# Altium PCB led_2835_driver_circle_10X10cm.PcbDoc
Units mm, origin at the board's own origin, x right, y up, seen from the top; angles counter-clockwise.
Board outline 100 x 100 mm, 2 copper layers (Top Layer, Bottom Layer); 37 components, 32 nets, 74 pads, 0 vias.
Unrouted connection lines stored in the file: 1.
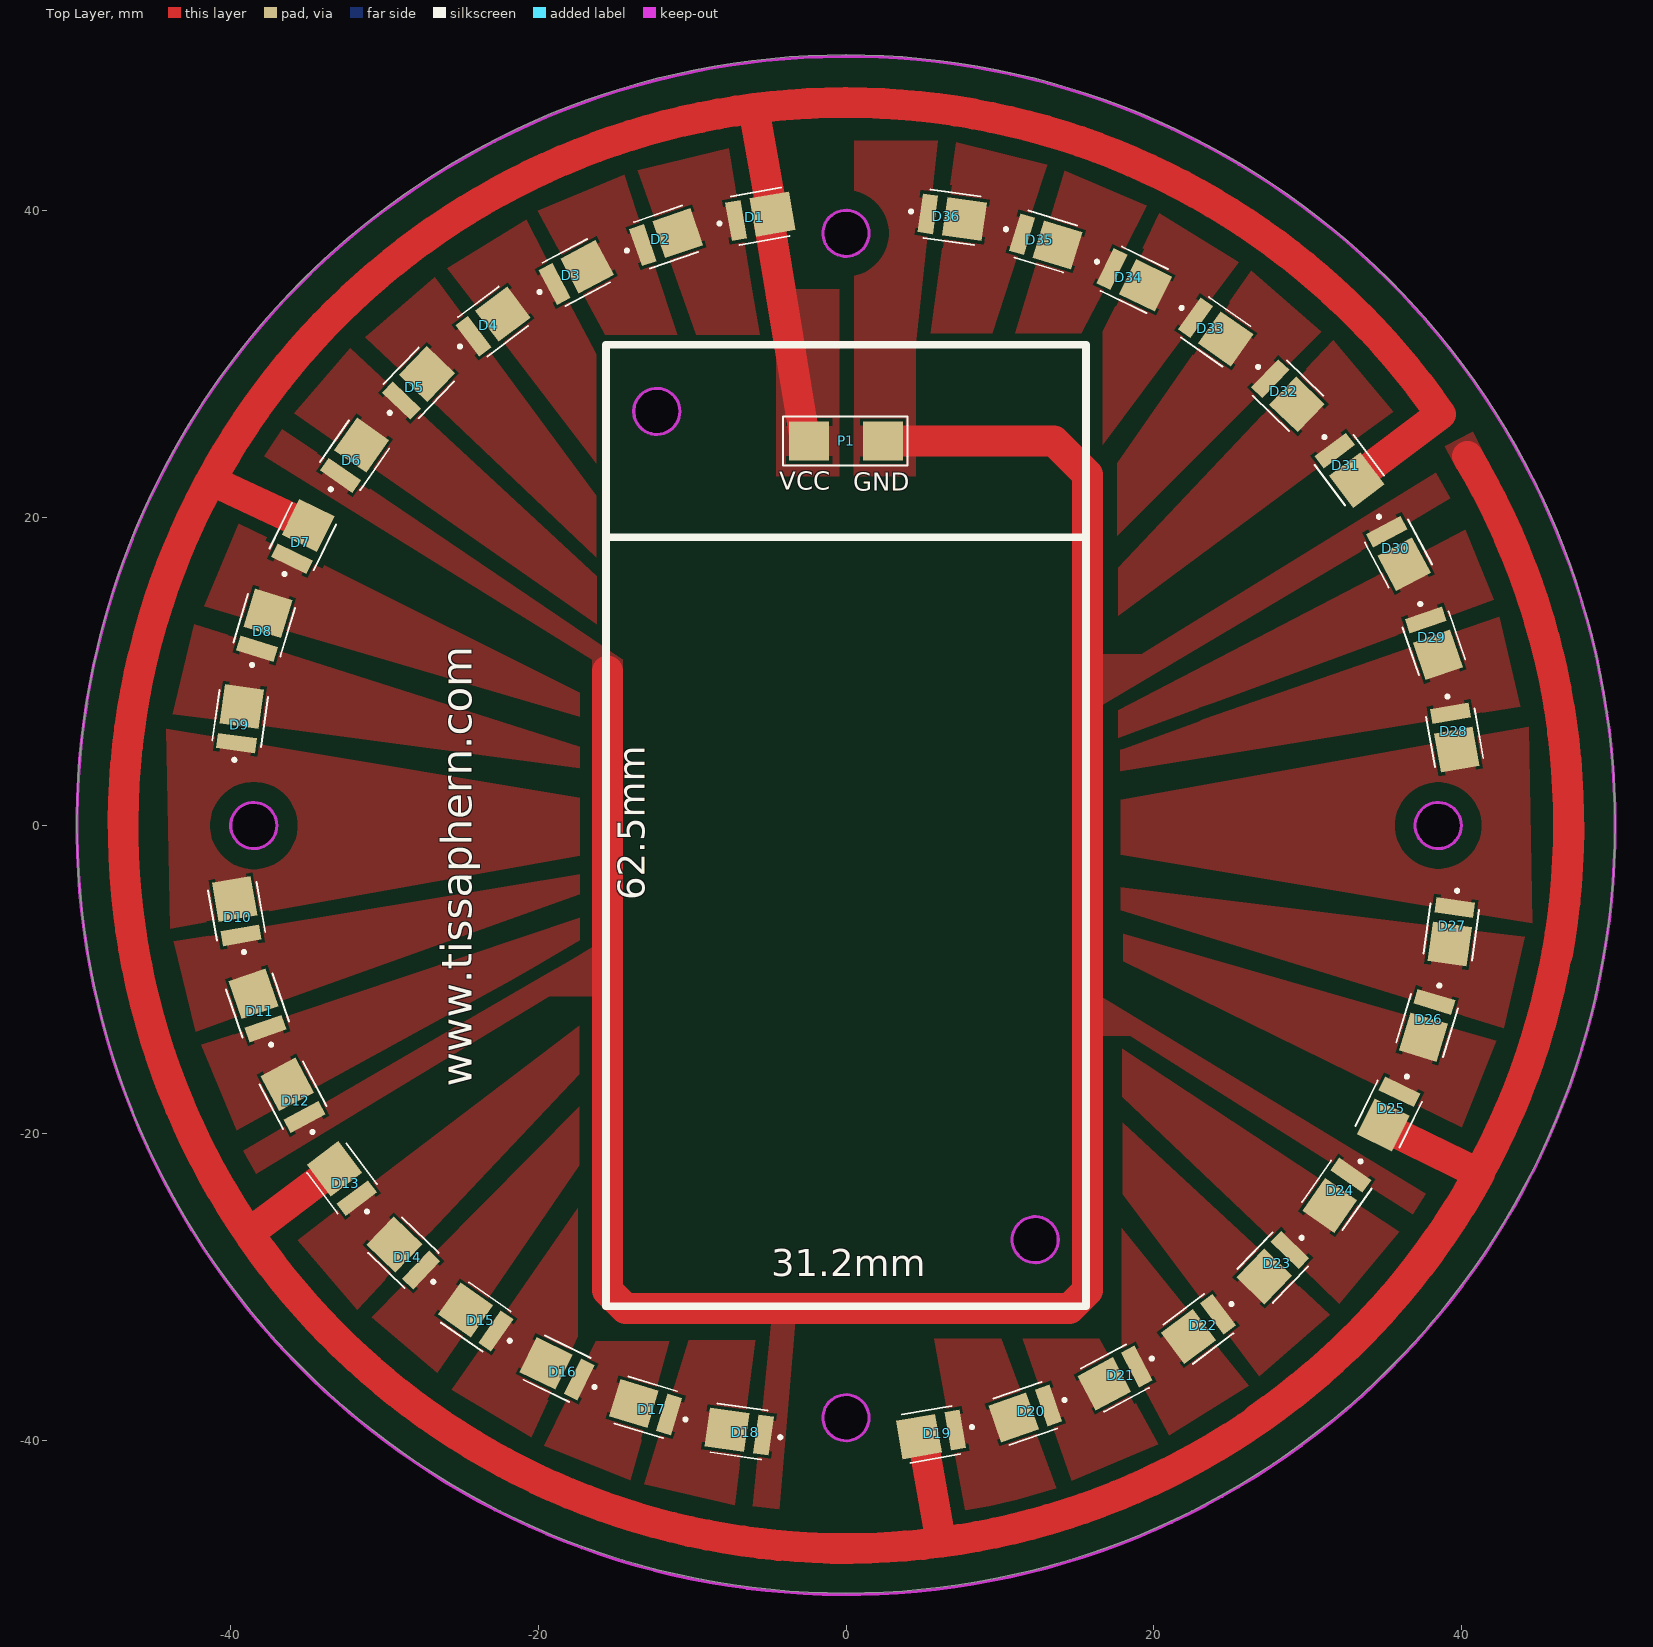
[diagram p0: Top Layer view]
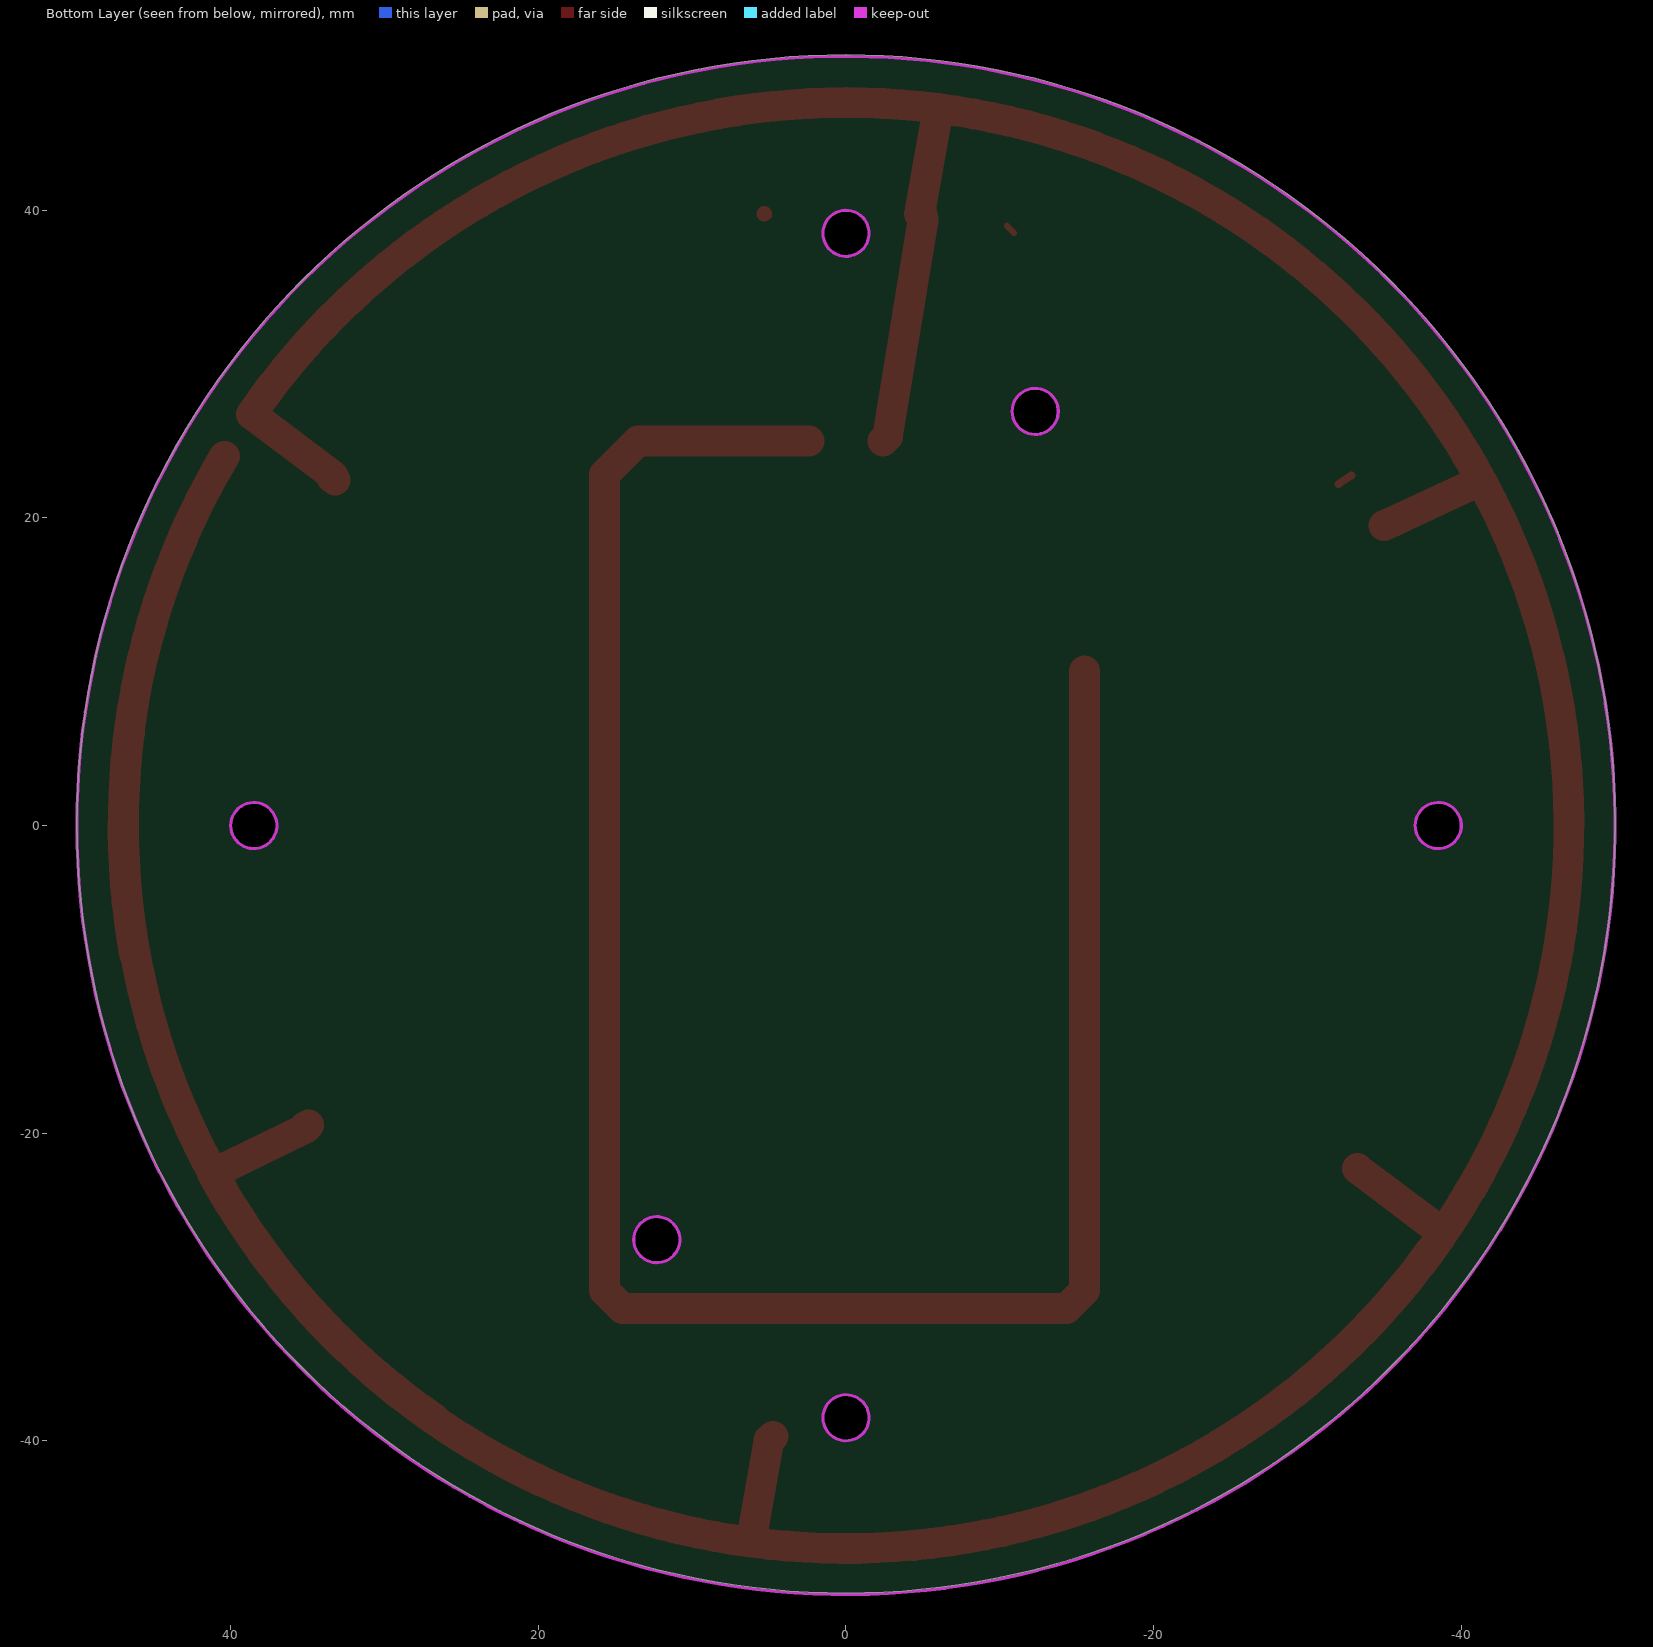
[diagram p1: Bottom Layer view, seen from below]

## Layer stack, top to bottom
Top Solder: solder mask 0.0102, Solder Resist, Dk 3.5
Top Layer: signal copper 0.0356
Dielectric 1: dielectric 0.32, FR-4, Dk 4.8
Bottom Layer: signal copper 0.0356
Bottom Solder: solder mask 0.0102, Solder Resist, Dk 3.5

## Board outline
-50,0.1 ccw(c0,0.1) 0,-49.9 ccw(c0,0.1) 50,0.1 ccw(c0,0.1) 0,50.1 ccw(c0,0.1)
cut-out: 10.8,-26.925 ccw(c12.3,-26.925) 12.3,-28.425 ccw(c12.3,-26.925) 13.8,-26.925 ccw(c12.3,-26.925) 12.3,-25.425 ccw(c12.3,-26.925)
cut-out: -12.3,25.425 cw(c-12.3,26.925) -13.8,26.925 cw(c-12.3,26.925) -12.3,28.425 cw(c-12.3,26.925) -10.8,26.925 cw(c-12.3,26.925)
cut-out: -37,0 ccw(c-38.5,0) -38.5,1.5 ccw(c-38.5,0) -40,0 ccw(c-38.5,0) -38.5,-1.5 ccw(c-38.5,0)
cut-out: -1.5,-38.5 ccw(c0,-38.5) 0,-40 ccw(c0,-38.5) 1.5,-38.5 ccw(c0,-38.5) 0,-37 ccw(c0,-38.5)
cut-out: 37,0 ccw(c38.5,0) 38.5,-1.5 ccw(c38.5,0) 40,0 ccw(c38.5,0) 38.5,1.5 ccw(c38.5,0)
cut-out: 0,37 cw(c0,38.5) -1.5,38.5 cw(c0,38.5) 0,40 cw(c0,38.5) 1.5,38.5 cw(c0,38.5)
cut-out: 0,3738.5 cw(c0,3740) -1.5,3740 cw(c0,3740) 0,3741.5 cw(c0,3740) 1.5,3740 cw(c0,3740)

## Design rules (kind name [scope] priority, off if disabled: settings)
Clearance Clearance_Poly [All vs InPolygon] p1: gap=0.8 ignorepadtopadclearanceinfootprint=FALSE
Clearance [All] p2: gap=0.3 ignorepadtopadclearanceinfootprint=FALSE
PolygonConnect PolygonConnect_52 [All vs IsNamedPolygon('VCC_L01_P113')] p1: connectstyle=Relief reliefconductorwidth=2 reliefentries=2 polygonreliefangle="90 Angle" airgapwidth=0.2
PolygonConnect PolygonConnect_51 [All vs IsNamedPolygon('GND_L01_P112')] p2: connectstyle=Relief reliefconductorwidth=2 reliefentries=2 polygonreliefangle="90 Angle" airgapwidth=0.2
PolygonConnect PolygonConnect_50 [All vs IsNamedPolygon('GND_L01_P111')] p3: connectstyle=Relief reliefconductorwidth=2 reliefentries=2 polygonreliefangle="90 Angle" airgapwidth=0.2
PolygonConnect PolygonConnect_49 [All vs IsNamedPolygon('GND_L01_P111')] p4: connectstyle=Relief reliefconductorwidth=2 reliefentries=4 polygonreliefangle="90 Angle" airgapwidth=0.254
PolygonConnect PolygonConnect_48 [All vs IsNamedPolygon('VCC_L01_P101')] p5: connectstyle=Relief reliefconductorwidth=2 reliefentries=2 polygonreliefangle="90 Angle" airgapwidth=0.2
PolygonConnect PolygonConnect_47 [All vs IsNamedPolygon('GND_L01_P100')] p6: connectstyle=Relief reliefconductorwidth=2 reliefentries=2 polygonreliefangle="90 Angle" airgapwidth=0.2
PolygonConnect PolygonConnect_46 [All vs IsNamedPolygon('GND_L01_P086')] p7: connectstyle=Relief reliefconductorwidth=2 reliefentries=2 polygonreliefangle="90 Angle" airgapwidth=0.2
PolygonConnect PolygonConnect_45 [All vs IsNamedPolygon('GND_L01_P086')] p8: connectstyle=Relief reliefconductorwidth=2 reliefentries=2 polygonreliefangle="90 Angle" airgapwidth=0.2
PolygonConnect PolygonConnect_44 [All vs IsNamedPolygon('GND_L01_P086')] p9: connectstyle=Relief reliefconductorwidth=0.254 reliefentries=4 polygonreliefangle="90 Angle" airgapwidth=0.2
PolygonConnect PolygonConnect_43 [All vs IsNamedPolygon('GND_L01_P086')] p10: connectstyle=Relief reliefconductorwidth=2 reliefentries=2 polygonreliefangle="90 Angle" airgapwidth=0.2
PolygonConnect PolygonConnect_42 [All vs IsNamedPolygon('NETD9_C_L01_P080')] p11: connectstyle=Relief reliefconductorwidth=2 reliefentries=2 polygonreliefangle="90 Angle" airgapwidth=0.2
PolygonConnect PolygonConnect_41 [All vs IsNamedPolygon('NETD27_C_L01_P081')] p12: connectstyle=Relief reliefconductorwidth=2 reliefentries=2 polygonreliefangle="90 Angle" airgapwidth=0.2
PolygonConnect PolygonConnect_40 [All vs IsNamedPolygon('GND_L01_P086')] p13: connectstyle=Relief reliefconductorwidth=2 reliefentries=2 polygonreliefangle="90 Angle" airgapwidth=0.2
PolygonConnect PolygonConnect_39 [All vs IsNamedPolygon('VCC_L01_P097')] p14: connectstyle=Relief reliefconductorwidth=2 reliefentries=2 polygonreliefangle="90 Angle" airgapwidth=0.2
PolygonConnect PolygonConnect_38 [All vs IsNamedPolygon('GND_L01_P095')] p15: connectstyle=Relief reliefconductorwidth=2 reliefentries=4 polygonreliefangle="90 Angle" airgapwidth=1
PolygonConnect PolygonConnect_37 [All vs IsNamedPolygon('GND_L01_P086')] p16: connectstyle=Direct reliefconductorwidth=2 reliefentries=4 polygonreliefangle="90 Angle" airgapwidth=0.2
PolygonConnect PolygonConnect_36 [All vs IsNamedPolygon('GND_L01_P095')] p17: connectstyle=Relief reliefconductorwidth=2 reliefentries=2 polygonreliefangle="90 Angle" airgapwidth=0.2
PolygonConnect PolygonConnect_35 [All vs IsNamedPolygon('GND_L01_P095')] p18: connectstyle=Relief reliefconductorwidth=2 reliefentries=2 polygonreliefangle="90 Angle" airgapwidth=0.2
PolygonConnect PolygonConnect_34 [All vs IsNamedPolygon('GND_L01_P086')] p19: connectstyle=Relief reliefconductorwidth=2 reliefentries=2 polygonreliefangle="90 Angle" airgapwidth=0.2
PolygonConnect PolygonConnect_33 [All vs IsNamedPolygon('GND_L01_P086')] p20: connectstyle=Relief reliefconductorwidth=2 reliefentries=2 polygonreliefangle="90 Angle" airgapwidth=0.2
PolygonConnect PolygonConnect_32 [All vs IsNamedPolygon('GND_L01_P091')] p21: connectstyle=Relief reliefconductorwidth=2 reliefentries=2 polygonreliefangle="90 Angle" airgapwidth=0.2
PolygonConnect PolygonConnect_31 [All vs IsNamedPolygon('GND_L01_P082')] p22: connectstyle=Relief reliefconductorwidth=2 reliefentries=2 polygonreliefangle="90 Angle" airgapwidth=0.2
PolygonConnect PolygonConnect_30 [All vs IsNamedPolygon('GND_L01_P082')] p23: connectstyle=Relief reliefconductorwidth=0.254 reliefentries=4 polygonreliefangle="90 Angle" airgapwidth=0.2
PolygonConnect PolygonConnect_29 [All vs IsNamedPolygon('GND_L01_P090')] p24: connectstyle=Relief reliefconductorwidth=2 reliefentries=2 polygonreliefangle="90 Angle" airgapwidth=0.2
PolygonConnect PolygonConnect_28 [All vs IsNamedPolygon('GND_L01_P088')] p25: connectstyle=Relief reliefconductorwidth=2 reliefentries=2 polygonreliefangle="90 Angle" airgapwidth=0.2
PolygonConnect PolygonConnect_27 [All vs IsNamedPolygon('GND_L01_P082')] p26: connectstyle=Relief reliefconductorwidth=2 reliefentries=2 polygonreliefangle="90 Angle" airgapwidth=0.2
PolygonConnect PolygonConnect_26 [All vs IsNamedPolygon('GND_L01_P087')] p27: connectstyle=Relief reliefconductorwidth=2 reliefentries=2 polygonreliefangle="90 Angle" airgapwidth=0.2
PolygonConnect PolygonConnect_25 [All vs IsNamedPolygon('GND_L01_P086')] p28: connectstyle=Relief reliefconductorwidth=2 reliefentries=2 polygonreliefangle="90 Angle" airgapwidth=0.2
PolygonConnect PolygonConnect_24 [All vs IsNamedPolygon('GND_L01_P086')] p29: connectstyle=Relief reliefconductorwidth=1 reliefentries=2 polygonreliefangle="90 Angle" airgapwidth=0.2
PolygonConnect PolygonConnect_23 [All vs IsNamedPolygon('GND_L01_P083')] p30: connectstyle=Relief reliefconductorwidth=1 reliefentries=2 polygonreliefangle="90 Angle" airgapwidth=0.2
PolygonConnect PolygonConnect_22 [All vs IsNamedPolygon('NETD9_C_L01_P079')] p31: connectstyle=Relief reliefconductorwidth=2 reliefentries=2 polygonreliefangle="90 Angle" airgapwidth=0.2
PolygonConnect PolygonConnect_21 [All vs IsNamedPolygon('NETD1_C_L01_P01')] p32: connectstyle=Relief reliefconductorwidth=2 reliefentries=2 polygonreliefangle="90 Angle" airgapwidth=0.2
PolygonConnect PolygonConnect_20 [All vs IsNamedPolygon('NETD1_C_L01_P01')] p33: connectstyle=Relief reliefconductorwidth=2 reliefentries=4 polygonreliefangle="90 Angle" airgapwidth=0.2
PolygonConnect PolygonConnect_19 [All vs IsNamedPolygon('NETD9_C_L01_P010')] p34: connectstyle=Relief reliefconductorwidth=2 reliefentries=4 polygonreliefangle="90 Angle" airgapwidth=0.2
PolygonConnect PolygonConnect_18 [All vs IsNamedPolygon('NETD1_C_L01_P032')] p35: connectstyle=Relief reliefconductorwidth=2 reliefentries=2 polygonreliefangle="90 Angle" airgapwidth=0.2
PolygonConnect PolygonConnect_17 [All vs IsNamedPolygon('NETD1_C_L01_P001')] p36: connectstyle=Relief reliefconductorwidth=2 reliefentries=2 polygonreliefangle="90 Angle" airgapwidth=0.2
PolygonConnect PolygonConnect_16 [All vs IsNamedPolygon('NETD1_C_L01_P001')] p37: connectstyle=Relief reliefconductorwidth=2.54 reliefentries=4 polygonreliefangle="90 Angle" airgapwidth=0.2
PolygonConnect PolygonConnect_15 [All vs IsNamedPolygon('NETD1_C_L01_P001')] p38: connectstyle=Relief reliefconductorwidth=3 reliefentries=4 polygonreliefangle="90 Angle" airgapwidth=0.2
PolygonConnect PolygonConnect_14 [All vs IsNamedPolygon('NETD1_C_L01_P001')] p39: connectstyle=Relief reliefconductorwidth=2 reliefentries=2 polygonreliefangle="90 Angle" airgapwidth=0.2
PolygonConnect PolygonConnect_13 [All vs IsNamedPolygon('NETD1_C_L01_P001')] p40: connectstyle=Relief reliefconductorwidth=2 reliefentries=2 polygonreliefangle="45 Angle" airgapwidth=0.2
PolygonConnect PolygonConnect_12 [All vs IsNamedPolygon('NETD1_C_L01_P001')] p41: connectstyle=Relief reliefconductorwidth=2 reliefentries=2 polygonreliefangle="90 Angle" airgapwidth=0.2
PolygonConnect PolygonConnect_11 [All vs IsNamedPolygon('NETD1_C_L01_P001')] p42: connectstyle=Relief reliefconductorwidth=1 reliefentries=2 polygonreliefangle="90 Angle" airgapwidth=0.1
PolygonConnect PolygonConnect_10 [All vs IsNamedPolygon('NETD1_C_L01_P001')] p43: connectstyle=Relief reliefconductorwidth=2 reliefentries=4 polygonreliefangle="90 Angle" airgapwidth=0.2
PolygonConnect PolygonConnect_9 [All vs IsNamedPolygon('NETD1_C_L01_P001')] p44: connectstyle=Relief reliefconductorwidth=1 reliefentries=4 polygonreliefangle="90 Angle" airgapwidth=0.2
PolygonConnect PolygonConnect_8 [All vs IsNamedPolygon('NETD1_C_L01_P001')] p45: connectstyle=Relief reliefconductorwidth=0.5 reliefentries=4 polygonreliefangle="90 Angle" airgapwidth=0.2
PolygonConnect "FIrst Net" [All vs IsNamedPolygon('NETD1_C_L01_P001')] p46: connectstyle=Relief reliefconductorwidth=1 reliefentries=4 polygonreliefangle="90 Angle" airgapwidth=1
PolygonConnect 1 [All vs IsNamedPolygon('NETD1_C_L01_P001')] p47: connectstyle=Relief reliefconductorwidth=1 reliefentries=4 polygonreliefangle="90 Angle" airgapwidth=1
PolygonConnect PolygonConnect_7 [All vs IsNamedPolygon('NETD1_C_L01_P001')] p48: connectstyle=Relief reliefconductorwidth=0.5 reliefentries=4 polygonreliefangle="90 Angle" airgapwidth=0.5
PolygonConnect "First Conection Style" [All vs IsNamedPolygon('NETD2_C_L01_P002')] p49: connectstyle=Relief reliefconductorwidth=1 reliefentries=4 polygonreliefangle="90 Angle" airgapwidth=1
PolygonConnect "First Connect Style" [All vs IsNamedPolygon('NETD1_C_L01_P001')] p50: connectstyle=Direct reliefconductorwidth=1 reliefentries=4 polygonreliefangle="90 Angle" airgapwidth=1
PolygonConnect PolygonConnect_6 [All vs IsNamedPolygon('NETD1_C_L01_P001')] p51: connectstyle=Relief reliefconductorwidth=1 reliefentries=4 polygonreliefangle="90 Angle" airgapwidth=0.254
PolygonConnect PolygonConnect_5 [All vs IsNamedPolygon('NETD1_C_L01_P001')] p52: connectstyle=Direct reliefconductorwidth=0.254 reliefentries=4 polygonreliefangle="90 Angle" airgapwidth=0.254
PolygonConnect PolygonConnect_4 [All vs IsNamedPolygon('NETD1_C_L01_P001')] p53: connectstyle=Relief reliefconductorwidth=0.254 reliefentries=4 polygonreliefangle="90 Angle" airgapwidth=0.254
PolygonConnect 1234 [All vs IsNamedPolygon('NONET_L01_P001')] p54: thpad.connectstyle=Relief thpad.reliefconductorwidth=0.254 thpad.reliefentries=4 thpad.polygonreliefangle="90 Angle" thpad.airgapwidth=0.254 smdpad.connectstyle=Direct smdpad.reliefconductorwidth=0.254 smdpad.reliefentries=4 smdpad.polygonreliefangle="90 Angle" smdpad.airgapwidth=0.254 via.connectstyle=Relief via.reliefconductorwidth=0.254 via.reliefentries=4 via.polygonreliefangle="90 Angle" via.airgapwidth=0.254
PolygonConnect PolygonConnect_3 [All vs IsNamedPolygon('NONET_L01_P001')] p55: thpad.connectstyle=Relief thpad.reliefconductorwidth=0.254 thpad.reliefentries=4 thpad.polygonreliefangle="90 Angle" thpad.airgapwidth=0.254 smdpad.connectstyle=Direct smdpad.reliefconductorwidth=0.254 smdpad.reliefentries=4 smdpad.polygonreliefangle="90 Angle" smdpad.airgapwidth=0.254 via.connectstyle=Relief via.reliefconductorwidth=0.254 via.reliefentries=4 via.polygonreliefangle="90 Angle" via.airgapwidth=0.254
PolygonConnect "SMD Pad Coccection" [All vs IsNamedPolygon('NONET_L01_P001')] p56: thpad.connectstyle=Relief thpad.reliefconductorwidth=0.254 thpad.reliefentries=4 thpad.polygonreliefangle="90 Angle" thpad.airgapwidth=0.254 smdpad.connectstyle=Direct smdpad.reliefconductorwidth=0.254 smdpad.reliefentries=4 smdpad.polygonreliefangle="90 Angle" smdpad.airgapwidth=0.254 via.connectstyle=Relief via.reliefconductorwidth=0.254 via.reliefentries=4 via.polygonreliefangle="90 Angle" via.airgapwidth=0.254
PolygonConnect PolygonConnect_2 [All vs IsNamedPolygon('NONET_L01_P001')] p57: thpad.connectstyle=Relief thpad.reliefconductorwidth=0.254 thpad.reliefentries=4 thpad.polygonreliefangle="90 Angle" thpad.airgapwidth=0.254 smdpad.connectstyle=Direct smdpad.reliefconductorwidth=0.254 smdpad.reliefentries=4 smdpad.polygonreliefangle="90 Angle" smdpad.airgapwidth=0.254 via.connectstyle=Relief via.reliefconductorwidth=0.254 via.reliefentries=4 via.polygonreliefangle="90 Angle" via.airgapwidth=0.254
PolygonConnect PolygonConnect_1 [All vs IsNamedPolygon('NONET_L01_P001')] p58: thpad.connectstyle=Relief thpad.reliefconductorwidth=0.254 thpad.reliefentries=4 thpad.polygonreliefangle="90 Angle" thpad.airgapwidth=1 smdpad.connectstyle=Relief smdpad.reliefconductorwidth=0.254 smdpad.reliefentries=4 smdpad.polygonreliefangle="90 Angle" smdpad.airgapwidth=0.254 via.connectstyle=Relief via.reliefconductorwidth=0.254 via.reliefentries=4 via.polygonreliefangle="90 Angle" via.airgapwidth=0.254
PolygonConnect [All] p59: connectstyle=Relief reliefconductorwidth=0.254 reliefentries=4 polygonreliefangle="90 Angle" airgapwidth=0.254
RoutingVias [All] p1: holewidth=0.711 width=1.27 viastyle="Through Hole" minholewidth=0.711 minwidth=1.27 maxholewidth=0.711 maxwidth=1.27
SolderMaskExpansion [All] p1: expansion=0.102 istentingtop=FALSE
Width [All] p1: maxlimit=3 minlimit=0.25 preferedwidth=0.3
30 further rules are at their usual default settings.

## Classes and differential pairs
polygon class PolygonClass_3: NONET_L01_P001

## Components (designator, comment, footprint, x,y, rotation, side; value= is the part's Value field where it differs from the comment)
D1 "OF-SMD2835Y" LED_OF-SMD2835Y#1 -5.567,39.611 r10 top
D2 "OF-SMD2835Y" LED_OF-SMD2835Y#2 -11.695,38.252 r19 top
D3 "OF-SMD2835Y" LED_OF-SMD2835Y#1 -17.535,35.952 r28 top
D4 "OF-SMD2835Y" LED_OF-SMD2835Y#1 -22.943,32.766 r37 top
D5 "OF-SMD2835Y" LED_OF-SMD2835Y#1 -27.786,28.774 r46 top
D6 "OF-SMD2835Y" LED_OF-SMD2835Y#1 -31.945,24.073 r55 top
D7 "OF-SMD2835Y" LED_OF-SMD2835Y#1 -35.318,18.779 r64 top
D8 "OF-SMD2835Y" LED_OF-SMD2835Y#1 -37.821,13.023 r73 top
D9 "OF-SMD2835Y" LED_OF-SMD2835Y#1 -39.392,6.946 r82 top
D10 "OF-SMD2835Y" LED_OF-SMD2835Y#1 -39.611,-5.567 r100 top
D11 "OF-SMD2835Y" LED_OF-SMD2835Y#1 -38.252,-11.695 r109 top
D12 "OF-SMD2835Y" LED_OF-SMD2835Y#1 -35.952,-17.535 r118 top
D13 "OF-SMD2835Y" LED_OF-SMD2835Y#1 -32.766,-22.943 r127 top
D14 "OF-SMD2835Y" LED_OF-SMD2835Y#1 -28.774,-27.786 r136 top
D15 "OF-SMD2835Y" LED_OF-SMD2835Y#1 -24.073,-31.945 r145 top
D16 "OF-SMD2835Y" LED_OF-SMD2835Y#1 -18.779,-35.318 r154 top
D17 "OF-SMD2835Y" LED_OF-SMD2835Y#1 -13.023,-37.821 r163 top
D18 "OF-SMD2835Y" LED_OF-SMD2835Y#1 -6.946,-39.392 r172 top
D19 "OF-SMD2835Y" LED_OF-SMD2835Y#1 5.526,-39.58 r190 top
D20 "OF-SMD2835Y" LED_OF-SMD2835Y#1 11.654,-38.221 r199 top
D21 "OF-SMD2835Y" LED_OF-SMD2835Y#1 17.494,-35.921 r208 top
D22 "OF-SMD2835Y" LED_OF-SMD2835Y#1 22.902,-32.735 r217 top
D23 "OF-SMD2835Y" LED_OF-SMD2835Y#1 27.746,-28.743 r226 top
D24 "OF-SMD2835Y" LED_OF-SMD2835Y#1 31.905,-24.042 r235 top
D25 "OF-SMD2835Y" LED_OF-SMD2835Y#1 35.277,-18.748 r244 top
D26 "OF-SMD2835Y" LED_OF-SMD2835Y#1 37.78,-12.992 r253 top
D27 "OF-SMD2835Y" LED_OF-SMD2835Y#1 39.352,-6.915 r262 top
D28 "OF-SMD2835Y" LED_OF-SMD2835Y#1 39.57,5.721 r280 top
D29 "OF-SMD2835Y" LED_OF-SMD2835Y#1 38.211,11.849 r289 top
D30 "OF-SMD2835Y" LED_OF-SMD2835Y#1 35.911,17.689 r298 top
D31 "OF-SMD2835Y" LED_OF-SMD2835Y#1 32.725,23.097 r307 top
D32 "OF-SMD2835Y" LED_OF-SMD2835Y#1 28.733,27.94 r316 top
D33 "OF-SMD2835Y" LED_OF-SMD2835Y#1 24.032,32.1 r325 top
D34 "OF-SMD2835Y" LED_OF-SMD2835Y#1 18.738,35.472 r334 top
D35 "OF-SMD2835Y" LED_OF-SMD2835Y#1 12.982,37.975 r343 top
D36 "OF-SMD2835Y" LED_OF-SMD2835Y#1 6.905,39.546 r352 top
P1 "Header 2" HDR1X2_SMD 0,25 r0 top

## Footprints (in the part's own frame and the unit in brackets; to place one, negate y for a bottom-side part, rotate by r counter-clockwise, add the part's x,y. Pads: shape width x height; smd on the part's side, far side on the other; paste and mask are expansions set on the pad)
HDR1X2_SMD [mm] "Connector; Header; 2 Position"
  rect 2.6x2.55 smd: 1(-2.4,0) 2(2.4,0)
  silkscreen extent -4.1,-1.6 4,1.6
LED_OF-SMD2835Y#1 [mm]
  rect 2.6x2.55 smd: A(0.8,0)
  rect 1x2.55 smd: C(-1.6,0)
  silkscreen extent -2.8,-1.6 1.65,1.6
LED_OF-SMD2835Y#2 [mm]
  rect 2.6x2.55 smd mask+0.102: A(0.8,0)
  rect 1x2.55 smd: C(-1.6,0)
  silkscreen extent -2.8,-1.6 1.65,1.6

## Part data
D1 D2 D3 D4 D5 D6 D7 D8 D9 D10 D11 D12 D13 D14 D15 D16 D17 D18 D19 D20 D21 D22 D23 D24 D25 D26 D27 D28 D29 D30 D31 D32 D33 D34 D35 D36: "LED; SMD; 2835, PLCC2; yellow; 2200-2800mcd; 2.8x3.5x0.75mm; 120Â°", Package=None, Availability=Unavailable, MP=OF-SMD2835Y, Price=None
P1: "Header, 2-Pin", LatestRevisionDate=17-Jul-2002, LatestRevisionNote="Re-released for DXP Platform.", Publisher="Altium Limited"

## Nets (pads, with @x,y where several pads share a name; then routed paths per layer and width w, separated by ;. In a path a pad name is that pad's centre, name@x,y a point inside that pad or via, vN(x,y) a via of type N, cw(c..) or ccw(c..) an arc to the next point about the centre after c; other vN are vias at no path point)
GND: D6.C D12.C D18.C D24.C D30.C D36.C P1.2 | length 141
  Top Layer w0.5: D6.C D6.C@-32.014,22.188 ; D36.C@5.053,39.661 D36.C
  Top Layer w2: -15.5,10.055 -15.5,-30.228 -14.328,-31.4 14.528,-31.4 15.7,-30.228 15.7,22.825 13.525,25 P1.2
NetD1_C: D1.C D2.A | length 0.7
  Top Layer w0.381: D2.A D2.A@-10.451,39
NetD2_C: D2.C D3.A
NetD3_C: D3.C D4.A
NetD4_C: D4.C D5.A
NetD5_C: D5.C D6.A
NetD7_C: D7.C D8.A
NetD8_C: D8.C D9.A
NetD9_C: D9.C D10.A
NetD10_C: D10.C D11.A
NetD11_C: D11.C D12.A
NetD13_C: D13.C D14.A
NetD14_C: D14.C D15.A
NetD15_C: D15.C D16.A
NetD16_C: D16.C D17.A
NetD17_C: D17.C D18.A
NetD19_C: D19.C D20.A
NetD20_C: D20.C D21.A
NetD21_C: D21.C D22.A
NetD22_C: D22.C D23.A
NetD23_C: D23.C D24.A
NetD25_C: D25.C D26.A
NetD26_C: D26.C D27.A
NetD27_C: D27.C D28.A
NetD28_C: D28.C D29.A
NetD29_C: D29.C D30.A
NetD31_C: D31.C D32.A
NetD32_C: D32.C D33.A
NetD33_C: D33.C D34.A
NetD34_C: D34.C D35.A
NetD35_C: D35.C D36.A
VCC: D1.A D7.A D13.A D19.A D25.A D31.A P1.1 | length 386.1
  Top Layer w1: D19.A D19.A@4.99,-40.461
  Top Layer w2: -41.03,22.316 -35.217,19.614 D7.A ; -38.714,-26.424 -33.467,-22.47 D13.A ; D1.A@-4.826,40.021 -5.989,46.617 ; D1.A -5.027,39.427 -2.7,25.275 P1.1 ; D19.A 5.002,-39.952 6.173,-46.593 ; 26.703,-38.609 ccw(c-0.035,0.045) 46.582,6.035 ; D31.A@33.426,22.624 D31.A 33.343,22.735 38.654,26.737 ccw(c0,0) -5.989,46.617 ; D25.A@35.174,-19.588 D25.A 35.127,-19.683 41.188,-22.639 cw(c0,0) 6.173,-46.593 ; 40.408,24.005 cw(c0,0) 46.238,-8.426 ; -5.989,46.617 ccw(c0,0) -41.437,22.18 ccw(c0,0) -38.701,-26.669 ccw(c0,0) 6.173,-46.593

## Polygon pours and split planes (outlines as drawn)
NetD20_C on Top Layer "NETD1_C_L01_P01" (solid, remove dead copper, pour order 56): 16.474,-33.35 20.303,-40.213 14.673,-42.611 11.48,-33.35
NetD19_C on Top Layer "NETD1_C_L01_P01" (solid, remove dead copper, pour order 54): 10.108,-33.375 13.754,-43.309 7.797,-44.802 5.743,-33.375
NetD32_C on Top Layer "NETD1_C_L01_P01" (solid, remove dead copper, pour order 73): 17.625,23.555 26.334,36.065 30.901,32.104 17.625,18.828
NetD31_C on Top Layer "NETD1_C_L01_P01" (solid, remove dead copper, pour order 70): 17.7,16.77 31.681,31.544 35.576,26.913 17.7,13.629
VCC on Top Layer "VCC_L01_P113" (solid, remove dead copper, pour order 113): -4.525,26.525 -4.525,22.7 -0.425,22.7 -0.425,34.875 -4.525,34.875
GND on Top Layer "GND_L01_P112" (solid, remove dead copper, pour order 112): 0.525,26.525 0.5,26.525 0.5,22.7 4.55,22.7 4.55,31 0.525,29.725
GND on Top Layer "GND_L01_P111" (solid, remove dead copper, pour order 111): 0.525,44.534 0.525,23.7 3.738,23.7 5.95,44.534
GND on Top Layer "GND_L01_P086" (solid, remove dead copper, pour order 86): -37.827,24.001 -16.506,10.775 -14.508,10.775 -36.65,25.759
GND on Top Layer "GND_L01_P109" (solid, remove dead copper, pour order 109): 14.725,11.125 20.775,11.125 20.8,11.1 19,9.3 17.175,9.3 17,9.125 14.725,9.125
GND on Top Layer "GND_L01_P107" (solid, remove dead copper, pour order 107): 14.85,-13.65 19.725,-13.65 18.3,-12.225 14.8,-12.225
NetD9_C on Top Layer "NETD9_C_L01_P080" (solid, remove dead copper, pour order 80): -43.93,-6.716 -44.176,6.282 -17.325,1.792 -17.325,-1.951
NetD29_C on Top Layer "NETD1_C_L01_P01" (solid, remove dead copper, pour order 68): 17.7,7.48 40.263,19.237 42.113,14.675 17.7,5.707
GND on Top Layer "GND_L01_P105" (solid, remove dead copper, pour order 105): -21.713,-11.1 -14.575,-11.1 -14.575,-6.752
GND on Top Layer "GND_L01_P104" (solid, remove dead copper, pour order 104): -16.506,10.775 -16.5,10.769 -16.5,8.325 -14.508,8.325 -14.508,10.775
NetD4_C on Top Layer "NETD1_C_L01_P01" (solid, remove dead copper, pour order 38): -16.25,17.45 -31.267,31.755 -26.721,35.648 -16.25,21.437
NetD2_C on Top Layer "NETD1_C_L01_P01" (solid, remove dead copper, pour order 36): -15.638,31.9 -20.047,39.968 -14.421,42.307 -10.971,31.9
NetD27_C on Top Layer "NETD27_C_L01_P081" (solid, remove dead copper, pour order 81): 44.385,6.426 44.627,-6.357 17.875,-1.884 17.875,1.678
NetD5_C on Top Layer "NETD1_C_L01_P01" (solid, remove dead copper, pour order 39): -16.2,13.087 -35.854,26.791 -32.238,31.036 -16.2,16.204
NetD3_C on Top Layer "NETD1_C_L01_P01" (solid, remove dead copper, pour order 37): -16.25,23.541 -25.923,36.229 -20.788,39.384 -16.25,30.624
VCC on Top Layer "VCC_L01_P103" (solid, remove dead copper, pour order 103): 39.7,23.2 38.935,24.645 40.734,25.592 41.499,24.147
NetD1_C on Top Layer "NETD1_C_L01_P01" (solid, remove dead copper, pour order 35): -9.721,31.9 -13.541,42.592 -7.623,44.02 -5.62,31.9
NetD7_C on Top Layer "NETD1_C_L01_P01" (solid, remove dead copper, pour order 41): -17.225,7.038 -41.704,14.242 -39.447,19.71 -17.225,8.575
NetD8_C on Top Layer "NETD1_C_L01_P01" (solid, remove dead copper, pour order 42): -17.3,3.713 -43.78,7.247 -42.385,13.088 -17.3,5.124
NetD10_C on Top Layer "NETD1_C_L01_P01" (solid, remove dead copper, pour order 43): -17.325,-4.478 -42.278,-13.392 -43.691,-7.538 -17.325,-3.166
NetD13_C on Top Layer "NETD1_C_L01_P01" (solid, remove dead copper, pour order 46): -17.35,-16.169 -31.789,-31.469 -35.658,-26.951 -17.35,-13.014
NetD14_C on Top Layer "NETD1_C_L01_P01" (solid, remove dead copper, pour order 47): -17.35,-22.083 -26.574,-35.583 -30.835,-31.952 -17.35,-18.271
NetD11_C on Top Layer "NETD1_C_L01_P01" (solid, remove dead copper, pour order 48): -17,-7.455 -39.62,-19.818 -41.928,-14.266 -17,-5.899
NetD15_C on Top Layer "NETD1_C_L01_P01" (solid, remove dead copper, pour order 51): -17.425,-33.192 -20.469,-39.767 -25.619,-36.681 -17.425,-24.888
NetD16_C on Top Layer "NETD1_C_L01_P01" (solid, remove dead copper, pour order 52): -11.476,-33.525 -14.02,-42.57 -19.61,-40.32 -16.279,-33.525
NetD17_C on Top Layer "NETD1_C_L01_P01" (solid, remove dead copper, pour order 53): -5.911,-33.45 -7.244,-44.188 -13.127,-42.838 -10.236,-33.45
NetD21_C on Top Layer "NETD1_C_L01_P01" (solid, remove dead copper, pour order 58): 17.925,-26.186 26.178,-36.406 21.002,-39.649 17.925,-33.834
NetD22_C on Top Layer "NETD1_C_L01_P01" (solid, remove dead copper, pour order 59): 18,-19.321 31.443,-31.792 26.858,-35.787 18,-23.983
NetD23_C on Top Layer "NETD1_C_L01_P01" (solid, remove dead copper, pour order 60): 17.975,-14.524 35.979,-26.411 32.076,-31.074 17.975,-17.633
NetD25_C on Top Layer "NETD1_C_L01_P01" (solid, remove dead copper, pour order 63): 18.012,-7.05 42.278,-13.996 40.023,-19.598 18.012,-8.808
NetD26_C on Top Layer "NETD1_C_L01_P01" (solid, remove dead copper, pour order 64): 17.875,-4.021 44.118,-7.241 42.757,-13.169 17.875,-5.507
NetD28_C on Top Layer "NETD1_C_L01_P01" (solid, remove dead copper, pour order 67): 17.825,5.02 42.474,13.583 43.834,7.724 17.825,3.525
NetD33_C on Top Layer "NETD1_C_L01_P01" (solid, remove dead copper, pour order 74): 16.7,32.114 20.377,39.816 25.529,36.605 16.7,24.76
NetD34_C on Top Layer "NETD1_C_L01_P01" (solid, remove dead copper, pour order 75): 10.994,32 14.221,42.568 19.565,40.307 15.309,32
NetD35_C on Top Layer "NETD1_C_L01_P01" (solid, remove dead copper, pour order 78): 5.505,32 7.155,44.423 13.077,42.955 9.494,32
GND on Top Layer "GND_L01_P087" (solid, remove dead copper, pour order 87): -38.339,-22.646 -14.598,-8.275 -15.264,-7.207 -39.186,-21.131
GND on Top Layer "GND_L01_P088" (solid, remove dead copper, pour order 88): -4.349,-44.448 -3.217,-31.1 -4.741,-31.1 -6.075,-44.243
GND on Top Layer "GND_L01_P090" (solid, remove dead copper, pour order 90): 37.699,-23.954 16.166,-10.855 15.586,-11.839 36.834,-25.272
GND on Top Layer "GND_L01_P091" (solid, remove dead copper, pour order 91): 38.348,22.948 15.193,8.654 15.969,7.434 39.296,21.286

## Keep-outs
Keep-Out Layer:
  circle w0.2: c12.3,-26.925 r1.5
  circle w0.2: c-12.3,26.925 r1.5
  circle w0.2: c38.5,0 r1.5
  circle w0.2: c0,-38.5 r1.5
  circle w0.2: c-38.5,0 r1.5
  circle w0.2: c0,38.5 r1.5
  circle w0.2: c0,0 r50

## Other copper
Top Layer:
  pour cut-out: 9.3,-26.925 ccw(c12.3,-26.925) 12.3,-29.925 ccw(c12.3,-26.925) 15.3,-26.925 ccw(c12.3,-26.925) 12.3,-23.925 ccw(c12.3,-26.925)
  pour cut-out: -12.3,23.925 cw(c-12.3,26.925) -15.3,26.925 cw(c-12.3,26.925) -12.3,29.925 cw(c-12.3,26.925) -9.3,26.925 cw(c-12.3,26.925)
  pour cut-out: 0,35.7 cw(c0,38.5) -2.8,38.5 cw(c0,38.5) 0,41.3 cw(c0,38.5) 2.8,38.5 cw(c0,38.5)
  pour cut-out: 0,-36 ccw(c0,-38.5) -2.5,-38.5 ccw(c0,-38.5) 0,-41 ccw(c0,-38.5) 2.5,-38.5 ccw(c0,-38.5)
  pour cut-out: -38.5,-2.828 cw(c-38.5,0) -41.328,0 cw(c-38.5,0) -38.5,2.828 cw(c-38.5,0) -35.672,0 cw(c-38.5,0)
  pour cut-out: 35.7,0 ccw(c38.5,0) 38.5,-2.8 ccw(c38.5,0) 41.3,0 ccw(c38.5,0) 38.5,2.8 ccw(c38.5,0)

## Silkscreen, mask and mechanical layers (free items; w line width, h text height)
Top Overlay:
  lines w0.5: -15.6,18.75 15.575,18.75 ; -15.6,-31.25 15.6,-31.25 15.6,31.25 -15.6,31.25 -15.6,-31.25
  text "VCC" at -4.35,21.434 h2
  text "GND" at 0.456,21.359 h2
  text "62.5mm" at -12.502,-4.858 h3 r90
  text "www.tissaphern.com" at -24.334,-16.995 h2 r90
  text "31.2mm" at -4.865,-29.873 h3

## Dimensions
-13.8,26.777 to -10.8,26.777 on Mechanical 1
10.8,-26.925 to 13.8,-26.925 on Mechanical 1
0,-37 to 0.074,-40 on Mechanical 1
-0.074,-40 to 0,-50 on Mechanical 1
-50,0.1 to 50,0.1 on Mechanical 1